# EAGLE board Servo_Board (EAGLE 8.1.1)
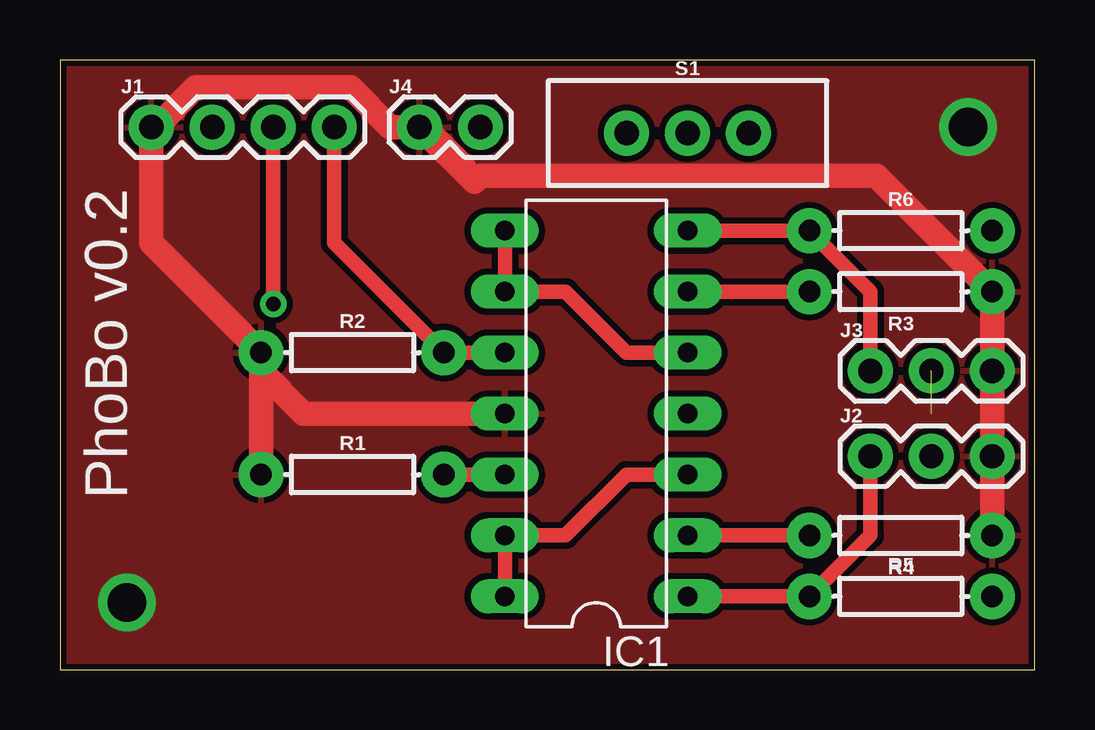
[diagram p0: board, top side]
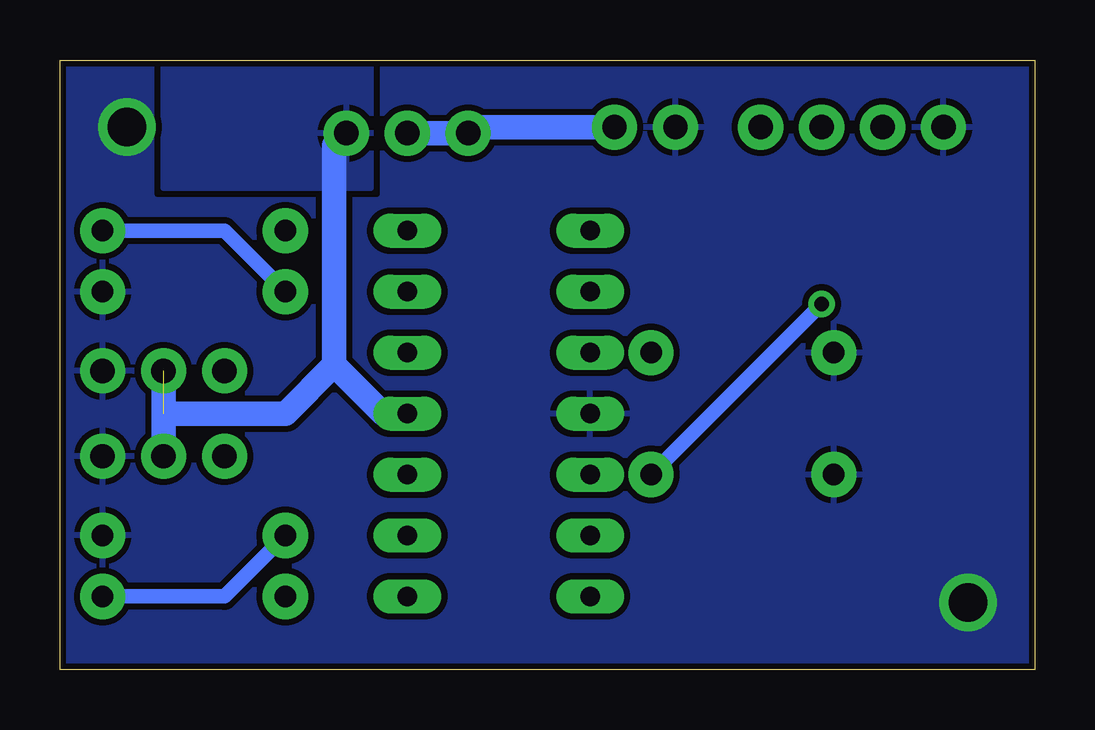
[diagram p1: board, bottom side, seen from below]

Size 40.64 x 25.4 mm. Coordinates in mm from the lower left corner, seen from the top.
Outline: 0,25.4 0,0 40.64,0 40.64,25.4 0,25.4
Copper layers (1*16): Top 0.035mm / dielectric 1.5mm / Bottom 0.035mm
Design rules "SparkFun": minimum track width 8mil, minimum drill 20mil, track to track 8mil, track to pad 8mil, pad to pad 8mil, via to via 8mil, smd to smd 8mil, copper to edge 8mil, drill to drill 8mil, minimum pad ring 12mil, minimum via ring 10mil, stop-mask expansion 4mil, vias tented up to drill 20mil, thermal gap 10mil

## Footprints (pad centres in the part's own frame; a part is rotated, then mirrored left to right if it is on the bottom)
DIL14 = drill 0.813 long: 1 -7.62,-3.81; 2 -5.08,-3.81; 3 -2.54,-3.81; 4 0,-3.81; 5 2.54,-3.81; 6 5.08,-3.81; 7 7.62,-3.81; 8 7.62,3.81; 9 5.08,3.81; 10 2.54,3.81; 11 0,3.81; 12 -2.54,3.81; 13 -5.08,3.81; 14 -7.62,3.81
1X04 = drill 1.016 pad 1.88: 1 0,0; 2 2.54,0; 3 5.08,0; 4 7.62,0
1X03 = drill 1.016 pad 1.88: 1 0,0; 2 2.54,0; 3 5.08,0
1X02 = drill 1.016 pad 1.88: 1 0,0; 2 2.54,0
AXIAL-0.3 = drill 0.9 pad 1.88: P$1 -3.81,0; P$2 3.81,0
SWITCH_SPDT_PTH_11.6X4.0MM = drill 1.016 pad 1.88: 1 0,2.54; 2 0,0; 3 0,-2.54

## Placement (x,y rotation side)
IC1  LM324N  [DIL14]  22.35,10.67 90 top
J1  [1X04]  3.81,22.61 0 top
J2  [1X03]  33.78,8.89 0 top
J3  [1X03]  33.78,12.45 0 top
J4  [1X02]  14.99,22.61 0 top
R1  10k  [AXIAL-0.3]  12.19,8.13 0 top
R2  10k  [AXIAL-0.3]  12.19,13.21 0 top
R3  2.4k  [AXIAL-0.3]  35.05,15.75 180 top
R4  2.4k  [AXIAL-0.3]  35.05,5.59 180 top
R5  10k  [AXIAL-0.3]  35.05,3.05 0 top
R6  10k  [AXIAL-0.3]  35.05,18.29 0 top
S1  [SWITCH_SPDT_PTH_11.6X4.0MM]  26.16,22.35 270 top

## Library data of the parts
IC1 = linear
J1 = SparkFun-Connectors; PROD_ID: CONN-09696
J2-J4 = SparkFun-Connectors
R1-R6 = SparkFun-Resistors; PROD_ID: RES-12183
S1 = SparkFun-Switches; PROD_ID: SWCH-08261; SF_SKU: COM-00102

## Nets
GND: IC1.11 J1.1 J2.3 J3.3 J4.1 R1.P$1 R2.P$1 R3.P$1 R4.P$1
N$1: IC1.5 IC1.8 IC1.9
N$2: IC1.6 R3.P$2 R6.P$2
N$3: J4.2 S1.2 S1.3
N$4: IC1.10 J1.4 R2.P$2
N$5: IC1.2 R4.P$2 R5.P$2
N$6: IC1.12 J1.3 R1.P$2
N$8: IC1.7 J3.1 R6.P$1
N$10: IC1.1 J2.1 R5.P$1
N$11: IC1.3 IC1.13 IC1.14
VCC: IC1.4 J2.2 J3.2 S1.1

## Tracks (layer width: path | path; a pad name or v marks a point on that pad's centre or on a via)
GND  (via drill 1.6)
  Top 1.016: J4.1 13.77,22.61 12.11,24.26 5.67,24.26 4.01,22.61 J1.1 3.81,17.78 R2.P$1 | R2.P$1 R1.P$1 | R2.P$1 8.38,12.45 10.16,10.67 IC1.11 | J4.1 15.19,22.61 16.84,20.95 | R4.P$1 J2.3 J3.3 R3.P$1 34.04,20.57 17.53,20.57 17.27,20.32 J4.1
  other vias: 2.79,2.79 37.85,22.61
  pour Top (isolate 0.254, rank 6): 0,25.4 40.64,25.4 40.64,0 0,0
  pour Bottom (isolate 0.254, rank 6): 0,25.4 40.64,25.4 40.64,0 0,0
N$1
  Top 0.61: IC1.8 IC1.9 21.08,15.75 23.62,13.21 IC1.5
N$2
  Top 0.61: IC1.6 R3.P$2
  Bottom 0.61: R3.P$2 33.78,18.29 R6.P$2
N$3
  Bottom 1.016: J4.2 23.37,22.61 S1.3 S1.2
N$4
  Top 0.61: IC1.10 R2.P$2 11.43,17.78 J1.4
N$5
  Top 0.61: IC1.2 R4.P$2
  Bottom 0.61: R4.P$2 33.78,3.05 R5.P$2
N$6  (via drill 0.6)
  Top 0.61: R1.P$2 IC1.12 | J1.3 v8.89,15.24
  Bottom 0.61: R1.P$2 v8.89,15.24
N$8
  Top 0.61: J3.1 33.78,15.75 R6.P$1 IC1.7
N$10
  Top 0.61: J2.1 33.78,5.59 R5.P$1 IC1.1
N$11
  Top 0.61: IC1.14 IC1.13 21.08,5.59 23.62,8.13 IC1.3
VCC  (1 unrouted)
  Bottom 1.016: 29.21,12.7 27.18,10.67 IC1.4 | J3.2 J2.2 | 29.21,12.7 31.24,10.67 36.32,10.67 | S1.1 29.21,21.84 29.21,12.7
  pour Bottom (isolate 0.254): 27.69,25.4 27.69,20.07 36.32,20.07 36.32,25.4

## Text on the board
_tsilk: PhoBo v0.2